# Altium PCB BMS_V0.1.PcbDoc
Units mm, origin at the board's own origin, x right, y up, seen from the top; angles counter-clockwise.
Board outline 57.9 x 36.8 mm, 2 copper layers (Top Layer, Bottom Layer); 42 components, 41 nets, 151 pads, 12 vias.
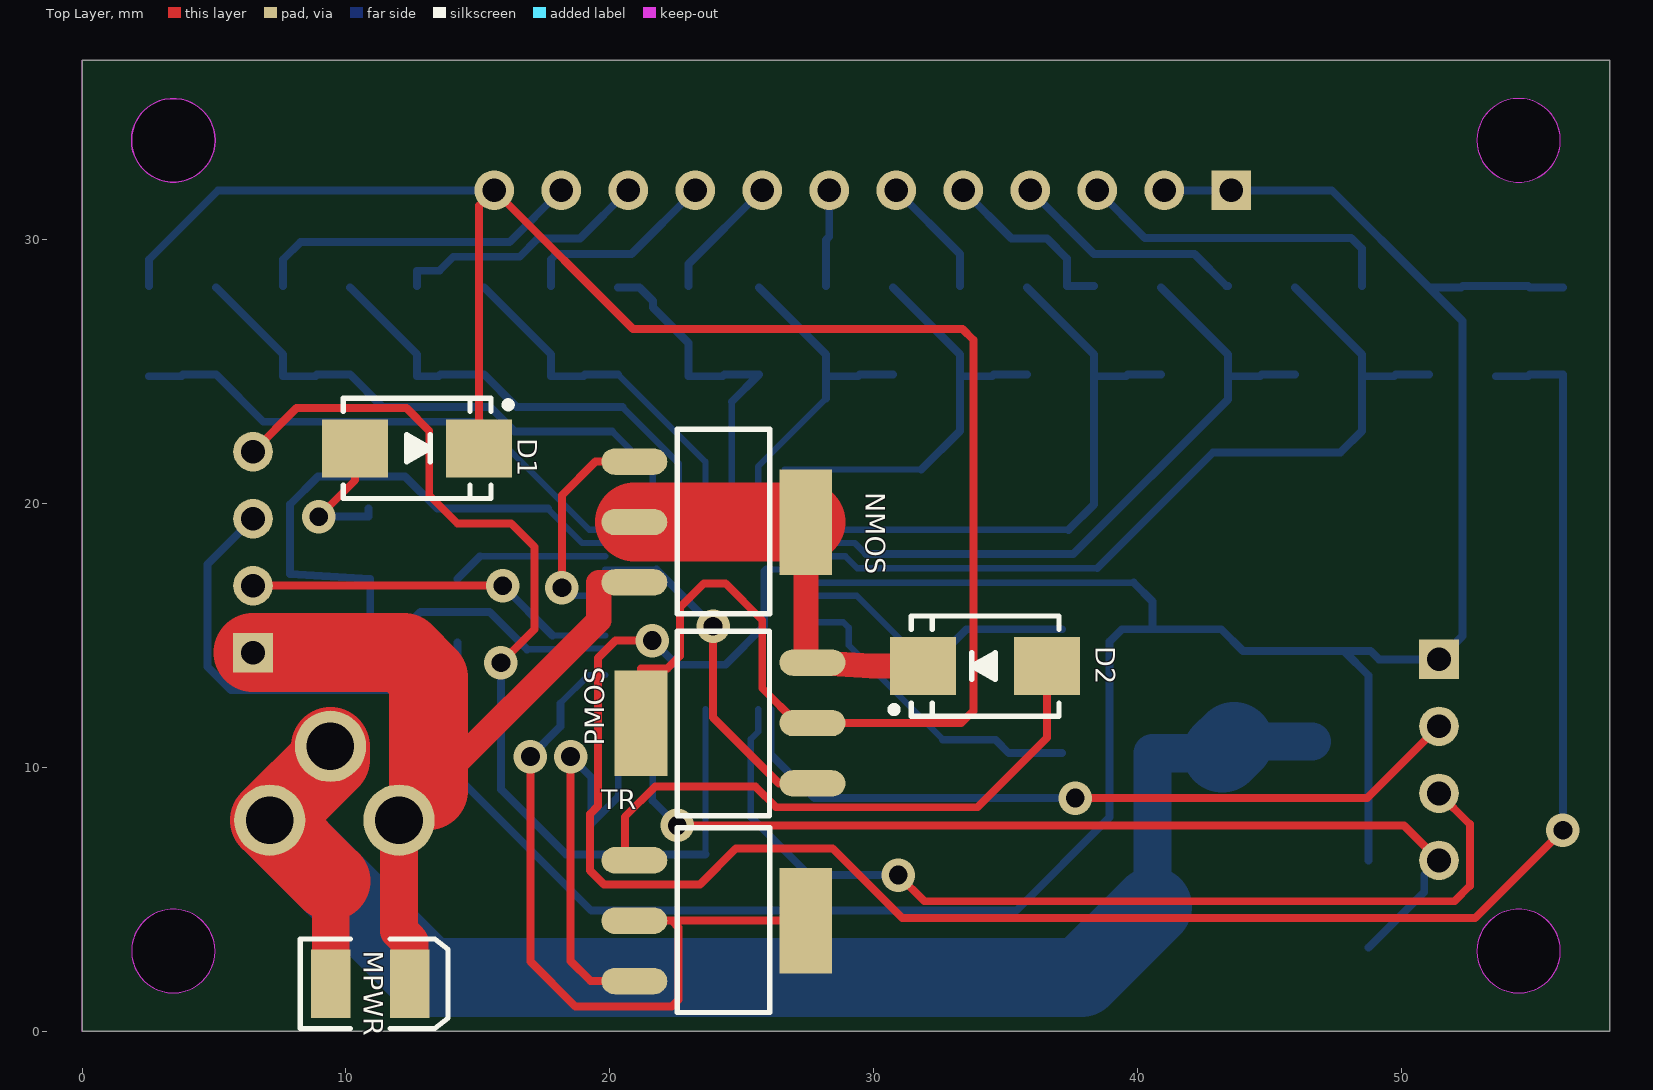
[diagram p0: Top Layer view]
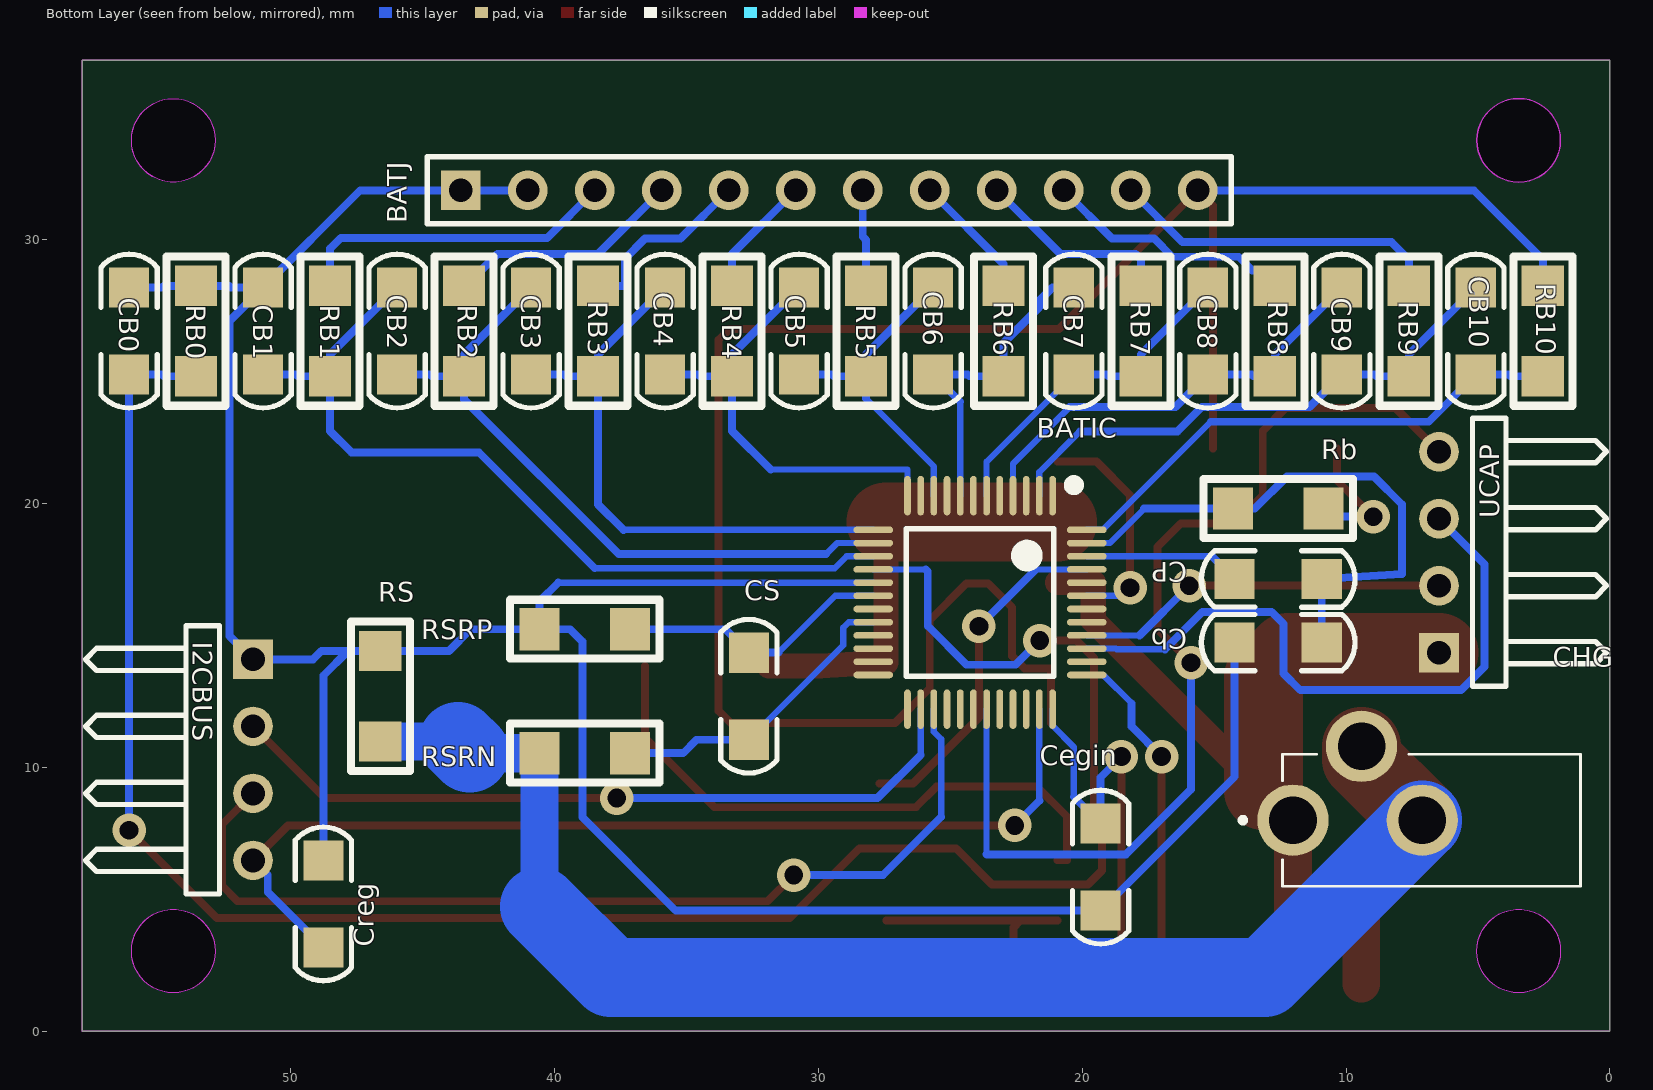
[diagram p1: Bottom Layer view, seen from below]
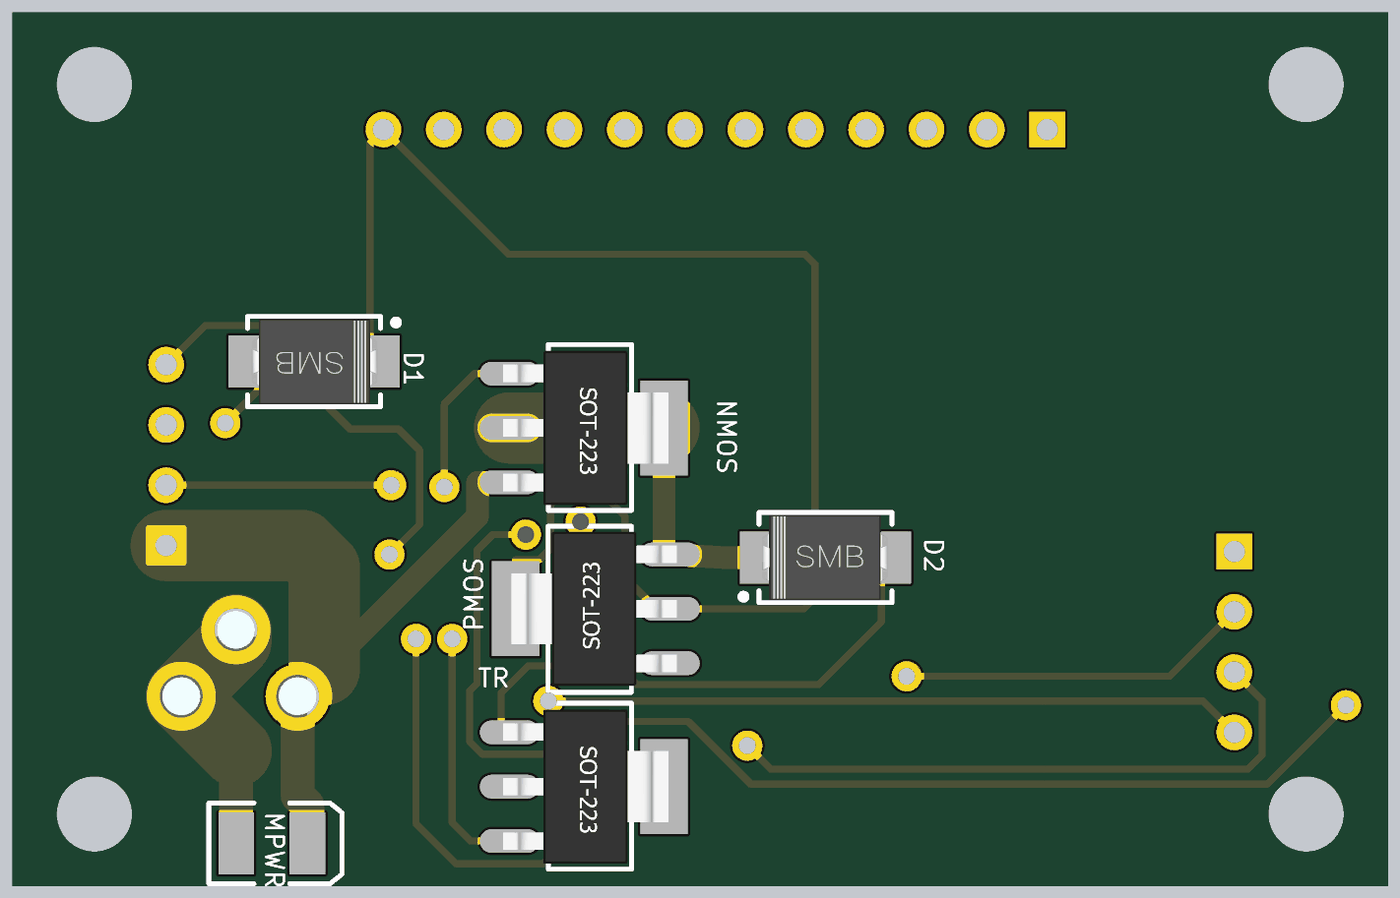
[diagram p2: 3D render of the assembled board from above, using the file's embedded part models]
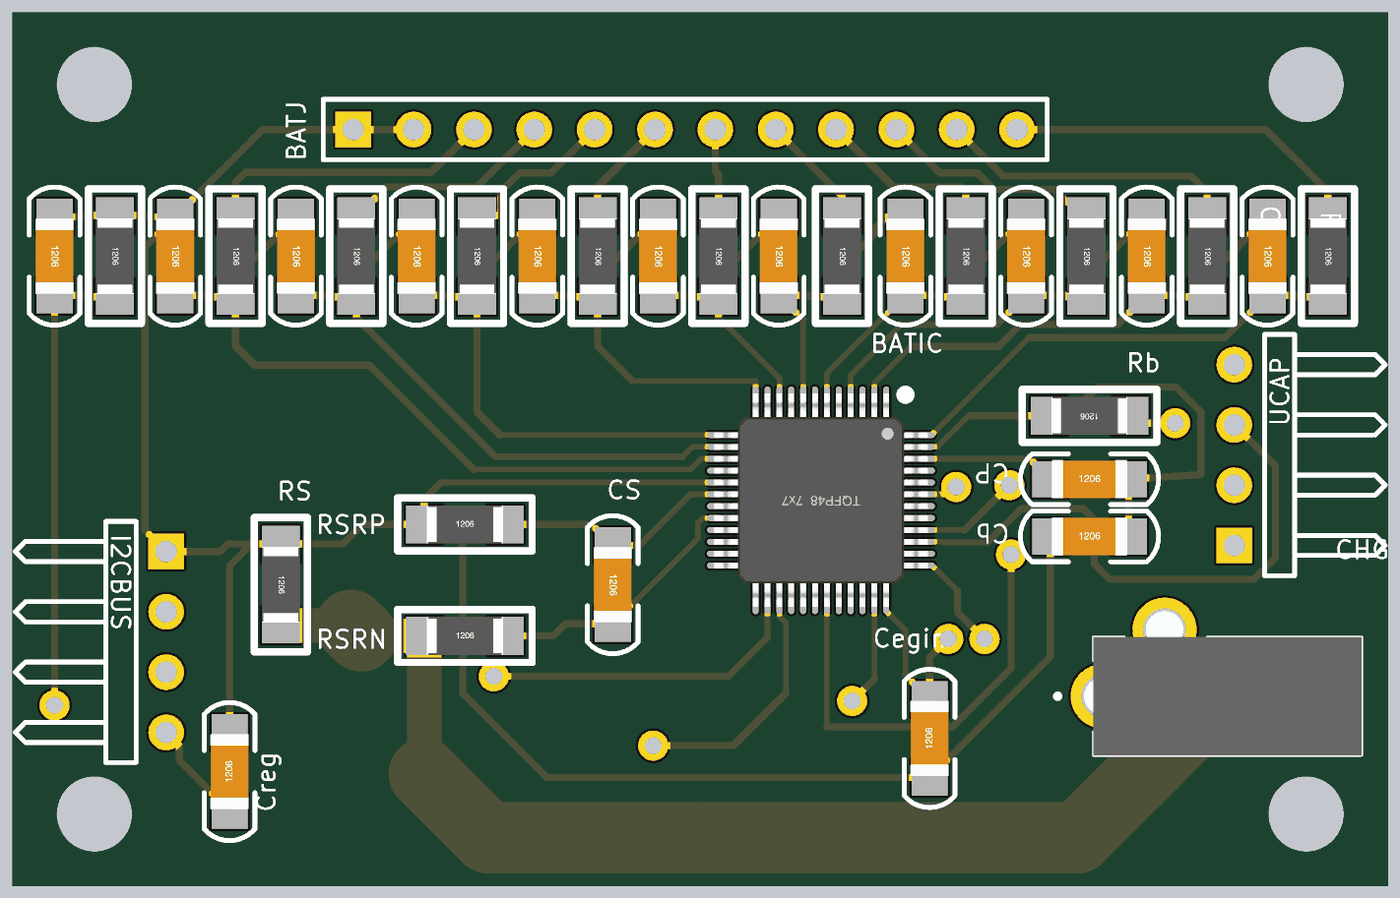
[diagram p3: 3D render of the assembled board from below, using the file's embedded part models]

## Layer stack, top to bottom
Top Solder: solder mask 0.0102, Solder Resist, Dk 3.5
Top Layer: signal copper 0.0356
Dielectric 1: dielectric 0.32, FR-4, Dk 4.8
Bottom Layer: signal copper 0.0356
Bottom Solder: solder mask 0.0102, Solder Resist, Dk 3.5

## Board outline
0.006,0.006 0.006,36.806 57.906,36.806 57.906,0.006
cut-out: 52.871,3.04 ccw(c54.456,3.04) 54.456,1.455 ccw(c54.456,3.04) 56.041,3.04 ccw(c54.456,3.04) 54.456,4.625 ccw(c54.456,3.04)
cut-out: 1.871,3.04 ccw(c3.456,3.04) 3.456,1.455 ccw(c3.456,3.04) 5.041,3.04 ccw(c3.456,3.04) 3.456,4.625 ccw(c3.456,3.04)
cut-out: 52.871,33.773 ccw(c54.456,33.773) 54.456,32.188 ccw(c54.456,33.773) 56.041,33.773 ccw(c54.456,33.773) 54.456,35.358 ccw(c54.456,33.773)
cut-out: 3.456,32.188 cw(c3.456,33.773) 1.871,33.773 cw(c3.456,33.773) 3.456,35.358 cw(c3.456,33.773) 5.041,33.773 cw(c3.456,33.773)

## Design rules (kind name [scope] priority, off if disabled: settings)
Clearance Clearance_1 [InComponent('BATIC')] p1: gap=0.254 ignorepadtopadclearanceinfootprint=TRUE except(0: SMDPad-SMDPad SMDPad-THPad)
Clearance [All] p2: gap=0.254 ignorepadtopadclearanceinfootprint=FALSE
PolygonConnect [All] p1: connectstyle=Relief reliefconductorwidth=0.254 reliefentries=4 polygonreliefangle="90 Angle" airgapwidth=0.254
RoutingVias [All] p1: holewidth=0.711 width=1.27 viastyle="Through Hole" minholewidth=0.711 minwidth=1.27 maxholewidth=0.711 maxwidth=1.27
SMDNeckDown SMDNeckDown_1 [All] p1 off: percent=50.000
SMDNeckDown [All] p2: percent=95.000
SolderMaskExpansion [All] p1: expansion=0.102 istentingtop=FALSE
Width Width_4 [(InNet('BAT+') OR InNet('BAT-') OR InNet('BATM'))] p1: maxlimit=5 minlimit=0.9 preferedwidth=3
Width [All] p2: maxlimit=0.5 minlimit=0.1 preferedwidth=0.3
30 further rules are at their usual default settings.

## Components (designator, comment, footprint, x,y, rotation, side; value= is the part's Value field where it differs from the comment)
BATIC "BQ7694201PFBR" "TQFP48 7x7_L" 23.876,16.256 r0 bottom
BATJ "MHDR1X12" HDR1X12 43.561,31.877 r180 bottom
Cb "Cap" "C 1206" 12.573,14.732 r180 bottom value=100pF
CB0 "Cap" "C 1206" 56.134,26.543 r270 bottom value=100pF
CB1 "Cap" "C 1206" 51.054,26.543 r270 bottom value=100pF
CB2 "Cap" "C 1206" 45.974,26.543 r270 bottom value=100pF
CB3 "Cap" "C 1206" 40.894,26.543 r270 bottom value=100pF
CB4 "Cap" "C 1206" 35.814,26.543 r270 bottom value=100pF
CB5 "Cap" "C 1206" 30.734,26.543 r270 bottom value=100pF
CB6 "Cap" "C 1206" 25.654,26.543 r270 bottom value=100pF
CB7 "Cap" "C 1206" 20.32,26.543 r270 bottom value=100pF
CB8 "Cap" "C 1206" 15.24,26.543 r270 bottom value=100pF
CB9 "Cap" "C 1206" 10.16,26.543 r270 bottom value=100pF
CB10 "Cap" "C 1206" 5.08,26.543 r270 bottom value=100pF
Cegin "Cap" "C 1206" 19.304,6.223 r90 bottom value=100pF
CHG "694102303002" 694102303002 12.012,8.001 r0 bottom
CP "Cap" "C 1206" 12.573,17.145 r180 bottom value=100pF
Creg "Cap" "C 1206" 48.768,4.826 r90 bottom value=100pF
CS "Cap" "C 1206" 32.639,12.7 r270 bottom value=100pF
D1 "Diode 10TQ035" SMB 12.7,22.098 r0 top
D2 "Diode 10TQ035" SMB 34.227,13.843 r180 top
I2CBUS "Header 4" HDR1X4H 51.435,14.097 r270 bottom
MPWR "Header 2" 3.5X2.8X1.9 10.922,1.8 r0 top
NMOS "NMOS-2" SOT-223 27.432,19.304 r270 top
PMOS "PMOS-2" SOT-223 21.186,11.684 r90 top
Rb "Res2" "R 1206" 12.573,19.812 r0 bottom value=1K
RB0 "Res2" "R 1206" 53.594,26.543 r270 bottom value=1K
RB1 "Res2" "R 1206" 48.514,26.543 r270 bottom value=1K
RB2 "Res2" "R 1206" 43.434,26.543 r270 bottom value=1K
RB3 "Res2" "R 1206" 38.354,26.543 r270 bottom value=1K
RB4 "Res2" "R 1206" 33.274,26.543 r270 bottom value=1K
RB5 "Res2" "R 1206" 28.194,26.543 r270 bottom value=1K
RB6 "Res2" "R 1206" 22.987,26.543 r270 bottom value=1K
RB7 "Res2" "R 1206" 17.78,26.543 r270 bottom value=1K
RB8 "Res2" "R 1206" 12.7,26.543 r270 bottom value=1K
RB9 "Res2" "R 1206" 7.62,26.543 r270 bottom value=1K
RB10 "Res2" "R 1206" 2.54,26.543 r270 bottom value=1K
RS "Res2" "R 1206" 46.609,12.7 r270 bottom value=1K
RSRN "Res2" "R 1206" 38.862,10.541 r180 bottom value=1K
RSRP "Res2" "R 1206" 38.862,15.24 r180 bottom value=1K
TR "NPN" SOT-223 27.432,4.191 r270 top
UCAP "Header 5" HDR1X4H 6.477,14.351 r90 bottom

## Footprints (in the part's own frame and the unit in brackets; to place one, negate y for a bottom-side part, rotate by r counter-clockwise, add the part's x,y. Pads: shape width x height; smd on the part's side, far side on the other; paste and mask are expansions set on the pad)
3.5X2.8X1.9 [mm] "SM LED; 2 C-Bend Leads; Body 3.5 x 2.8 x 1.9 mm, inc leads (LxWxH typ)"
  rect 1.5x2.6 smd: 1(-1.5,0) 2(1.5,0)
  silkscreen extent -2.65,-1.7 2.95,1.7
694102303002 [mm]
  round 2.704 hole 1.803: 1(0,0) 2(-4.9,0) 3(-2.6,-2.8)
  silkscreen extent -10.9,-2.5 2,2.5, body extent -10.9,-3.6 0.8,2.5, height 7.7
"C 1206" [mil] "无极性贴片电容"
  rect 60x60 smd: 1(-65,0) 2(65,0)
  silkscreen extent -115,-42 115,42, body extent -63,-32 63,32, height 48
HDR1X4H [mm] "Connector; Header; 4 Position; Right Angle"
  rect 1.5x1.5 hole 0.9: 1(0,0)
  round 1.5 hole 0.9: 2(2.54,0) 3(5.08,0) 4(7.62,0)
  silkscreen extent -1.27,-6.35 8.89,-1.27
HDR1X12 [mm] "Connector; Header; 12 Position"
  rect 1.5x1.5 hole 0.9: 1(0,0)
  round 1.5 hole 0.9: 2(2.54,0) 3(5.08,0) 4(7.62,0) 5(10.16,0) 6(12.7,0) 7(15.24,0) 8(17.78,0) 9(20.32,0) 10(22.86,0) 11(25.4,0) 12(27.94,0)
  silkscreen extent -1.27,-1.27 29.21,1.27
"R 1206" [mil] "1/4W贴片电阻"
  rect 60x62.99 smd: 1(-67.5,0) 2(67.5,0)
  silkscreen extent -112,-44 112,44, body extent -63,-31 63,31, height 22
SMB [mm] "4.7*3.9*2.2mm(长宽高，不包括引脚）"
  rect 2.5x2.2 smd: 1(-2.35,0) 2(2.35,0)
  silkscreen extent -2.8,-1.9 3.58,1.9, body extent -2.63,-1.8 2.67,1.8, height 2.35
SOT-223 [mm]
  oval 1x2.5 smd: 1(-2.29,-6.5) 2(0,-6.5) 3(2.29,-6.5)
  rect 4x2 smd: 2(0,0)
  silkscreen extent -3.52,-4.87 3.48,-1.37, body extent -3.25,-6.78 3.25,0.18, height 1.68
"TQFP48 7x7_L" [mm] "48脚，体宽：7x7mm, 脚距：0.5mm"
  oval 0.25x1.5 smd: 1(-2.75,-4.046) 2(-2.25,-4.046) 3(-1.75,-4.046) 4(-1.25,-4.046) 5(-0.75,-4.046) 6(-0.25,-4.046) 7(0.25,-4.046) 8(0.75,-4.046) 9(1.25,-4.046) 10(1.75,-4.046) 11(2.25,-4.046) 12(2.75,-4.046) 25(2.75,4.046) 26(2.25,4.046) 27(1.75,4.046) 28(1.25,4.046) 29(0.75,4.046) 30(0.25,4.046) 31(-0.25,4.046) 32(-0.75,4.046) 33(-1.25,4.046) 34(-1.75,4.046) 35(-2.25,4.046) 36(-2.75,4.046)
  oval 1.5x0.25 smd: 13(4.046,-2.75) 14(4.046,-2.25) 15(4.046,-1.75) 16(4.046,-1.25) 17(4.046,-0.75) 18(4.046,-0.25) 19(4.046,0.25) 20(4.046,0.75) 21(4.046,1.25) 22(4.046,1.75) 23(4.046,2.25) 24(4.046,2.75) 37(-4.046,2.75) 38(-4.046,2.25) 39(-4.046,1.75) 40(-4.046,1.25) 41(-4.046,0.75) 42(-4.046,0.25) 43(-4.046,-0.25) 44(-4.046,-0.75) 45(-4.046,-1.25) 46(-4.046,-1.75) 47(-4.046,-2.25) 48(-4.046,-2.75)
  silkscreen extent -3.68,-4.57 2.79,2.79, body extent -4.5,-4.5 4.5,4.5, height 1.05

## Part data
BATIC: "Integrated Circuit", Manufacturer_Name="Texas Instruments", Mouser Part Number=595-BQ7694201PFBR, Datasheet Link=https://www.ti.com/lit/gpn/bq76942, Height=1.2mm, Manufacturer_Part_Number=BQ7694201PFBR, Mouser Price/Stock=https://www.mouser.co.uk/ProductDetail/Texas-Instruments/BQ7694201PFBR?qs=iLbezkQI%252BsjbsTRVrFvjUA%3D%3D
BATJ: "Header, 12-Pin", LatestRevisionDate=17-Jul-2002, LatestRevisionNote="Re-released for DXP Platform.", Publisher="Altium Limited"
Cb CB0 CB1 CB2 CB3 CB4 CB5 CB6 CB7 CB8 CB9 CB10 Cegin CP Creg CS: "Capacitor", LatestRevisionDate=17-Jul-2002, LatestRevisionNote="Re-released for DXP Platform.", PackageDescription="Radial Cap, Thru-Hole; 2 Leads; 0.3 in Pin Spacing", PackageReference=RAD-0.3, Published=8-Jun-2000, Publisher="Altium Limited"
CHG: "Connector", Manufacturer_Name="Wurth Elektronik", Mouser Part Number=710-694102303002, Datasheet Link=https://katalog.we-online.de/em/datasheet/6941xx303002.pdf, Height=7.6mm, Manufacturer_Part_Number=694102303002, Mouser Price/Stock=https://www.mouser.co.uk/ProductDetail/Wurth-Elektronik/694102303002?qs=a9WhcLg8qCxbLC%252B3GMhS0A%3D%3D
D1 D2: "Schottky Rectifier", ComponentLink1Description="Manufacturer Link", ComponentLink1URL=http://www.irf.com/, ComponentLink2Description=Datasheet, ComponentLink2URL=http://www.irf.com/product-info/datasheets/data/10tq.pdf, DatasheetVersion=PD-2.057B, LatestRevisionDate=17-Jul-2002, LatestRevisionNote="Re-released for DXP Platform.", Note="Terminal 2 is the TAB and is electrically connected to the cathode", PackageDescription="TO, Thru-Hole, Vertical, Heatsink Mounted; 3 In-Line Leads (1 Absent); Pitch 2.54 mm", PackageReference=TO-220AC, PackageVersion=Feb-1998, Published=8-Jun-2000, Publisher="Altium Limited"
I2CBUS: "Header, 4-Pin", LatestRevisionDate=17-Jul-2002, LatestRevisionNote="Re-released for DXP Platform.", Publisher="Altium Limited"
MPWR: "Header, 2-Pin", LatestRevisionDate=17-Jul-2002, LatestRevisionNote="Re-released for DXP Platform.", Publisher="Altium Limited"
NMOS: "N-Channel Power MOSFET", ComponentLink1Description="Manufacturer Link", ComponentLink1URL=http://www.irf.com/, DatasheetVersion=PD-9.814, LatestRevisionDate=17-Jul-2002, LatestRevisionNote="Re-released for DXP Platform.", Note="Pin 2 is electrically connected to pin 4.", PackageDescription="TO, Thru-Hole, Vertical, Heatsink Mounted; 3 In-Line Leads; Pitch 2.54 mm", PackageReference=TO-220AB, PackageVersion=Feb-1997, Published=8-Jun-2000, Publisher="Altium Limited"
PMOS: "P-Channel Power MOSFET", ComponentLink1Description="Manufacturer Link", ComponentLink1URL=http://www.irf.com/, DatasheetVersion=PD-9.390D, LatestRevisionDate=17-Jul-2002, LatestRevisionNote="Re-released for DXP Platform.", Note="Pin 4 not drawn and electrically connected to Pin 2.", PackageDescription="TO, Thru-Hole, Vertical, Heatsink Mounted; 3 In-Line Leads; Pitch 2.54 mm", PackageReference=TO-220AB, PackageVersion=Feb-1997, Published=8-Jun-2000, Publisher="Altium Limited"
Rb RB0 RB1 RB2 RB3 RB4 RB5 RB6 RB7 RB8 RB9 RB10 RS RSRN RSRP: "Resistor", LatestRevisionDate=17-Jul-2002, LatestRevisionNote="Re-released for DXP Platform.", PackageDescription="Axial Device, Thru-Hole; 2 Leads; 0.4 in Pin Spacing", PackageReference=AXIAL-0.4, Published=8-Jun-2000, Publisher="Altium Limited"
TR: "NPN Bipolar Transistor", Code_JEDEC=TO-226-AA, LatestRevisionDate=17-Jul-2002, LatestRevisionNote="Re-released for DXP Platform.", PackageDescription="TO, Flat Index; 3 In-Line, Axial Leads; Body Dia. 4.8mm; Leads 0.55 x 0.51 mm (max)", PackageReference=TO-226-AA, Published=8-Jun-2000, Publisher="Altium Limited"
UCAP: "Header, 5-Pin", LatestRevisionDate=17-Jul-2002, LatestRevisionNote="Re-released for DXP Platform.", Publisher="Altium Limited"

## Via types
v1: diameter 1.27, hole 0.711, Top Layer to Bottom Layer, 12 vias

## Nets (pads, with @x,y where several pads share a name; then routed paths per layer and width w, separated by ;. In a path a pad name is that pad's centre, name@x,y a point inside that pad or via, vN(x,y) a via of type N, cw(c..) or ccw(c..) an arc to the next point about the centre after c; other vN are vias at no path point)
BAT: BATIC.47 Cb.2 CP.2 Rb.2 | length 21.5
  Bottom Layer w0.238: 17.653,19.812 18.959,18.506 BATIC.47
  Bottom Layer w0.3: Cb.2 CP.2 7.886,17.336 7.886,19.976 8.941,21.031 12.243,21.031 13.462,19.812 Rb.2 17.653,19.812
BAT10: BATJ.12 D1.2 PMOS.2 RB10.1 | length 80.7
  Top Layer w0.3: D1.2 15.05,31.306 BATJ.12 20.879,26.619 33.376,26.619 33.782,26.213 33.782,12.141 33.325,11.684 27.686,11.684 27.103,11.684 25.782,13.005 25.782,15.581 24.384,16.979 23.571,16.979 22.657,16.065 22.657,14.224 22.183,13.75 21.186,13.75 PMOS.2@21.186,11.684
  Bottom Layer w0.3: RB10.1 2.54,29.261 5.156,31.877 BATJ.12
BAT+: CHG.1 MPWR.2 NMOS.3 UCAP.1 | length 31.2
  Top Layer w0.95: CHG.1 13.132,9.121 19.583,15.572 19.583,17.014 NMOS.3
  Top Layer w1.425: CHG.1 12.012,3.81 12.422,3.4 MPWR.2
  Top Layer w3: UCAP.1 12.192,14.351 13.132,13.411 13.132,9.121
BAT-: CHG.2 CHG.3 MPWR.1 RS.2 RSRN.1 | length 60
  Top Layer w1.425: MPWR.1 9.422,5.691
  Top Layer w3: CHG.3 9.412,10.301 CHG.2 9.422,5.691
  Bottom Layer w1.448: 40.576,4.736 RSRN.1 43.218,10.541 ; 43.663,10.986 RS.2
  Bottom Layer w3: CHG.2 13.081,2.032 37.873,2.032 40.576,4.736 ; 43.218,10.541 43.663,10.986
BATM: D2.2 NMOS.2 PMOS.3 | length 16.3
  Top Layer w0.95: NMOS.2@27.432,19.304 27.432,13.974 PMOS.3 29.925,13.843 D2.2
  Top Layer w3: NMOS.2@20.932,19.304 NMOS.2@27.432,19.304
CP1: BATIC.46 CP.1 | length 6
  Bottom Layer w0.238: 15.085,18.006 BATIC.46
  Bottom Layer w0.3: CP.1 15.085,18.006
GND: BATIC.17 BATJ.1 BATJ.2 CB0.1 CB1.1 Cb.1 Cegin.1 Creg.2 I2CBUS.1 RB0.1 RS.1 RSRP.1 | length 107.2
  Bottom Layer w0.238: BATIC.17 39.865,17.006
  Bottom Layer w0.3: Cb.1 14.224,9.652 Cegin.1 35.408,4.572 38.949,8.113 38.949,14.768 39.421,15.24 RSRP.1 ; 39.865,17.006 40.576,16.294 RSRP.1 ; BATJ.2 BATJ.1 47.371,31.877 CB1.1 ; Creg.2 48.768,13.48 47.834,14.414 ; CB0.1 54.877,28.194 54.813,28.258 RB0.1 52.337,28.258 52.273,28.194 CB1.1 ; RSRP.1 43.18,15.24 44.005,14.414 RS.1 47.834,14.414 ; 47.834,14.414 48.844,14.414 49.162,14.097 I2CBUS.1 52.324,14.986 52.324,26.924 CB1.1
NetBATIC_2: BATIC.2 CB9.2 CB10.1 RB9.2 | length 20.9
  Bottom Layer w0.238: 20.09,22.734 21.626,21.198 BATIC.2
  Bottom Layer w0.3: CB10.1 7.62,25.654 RB9.2 8.839,24.829 8.903,24.892 CB9.2 11.389,23.663 15.468,23.663 16.396,22.734 20.09,22.734
NetBATIC_4: BATIC.4 CB8.2 CB9.1 RB8.2 | length 17
  Bottom Layer w0.238: 20.483,23.663 22.626,21.519 BATIC.4
  Bottom Layer w0.3: CB9.1 12.7,25.654 RB8.2 13.52,24.829 13.583,24.892 CB8.2 16.469,23.663 20.483,23.663
NetBATIC_6: BATIC.6 CB7.2 CB8.1 RB7.2 | length 12.9
  Bottom Layer w0.238: CB7.2 23.626,21.586 BATIC.6
  Bottom Layer w0.3: CB8.1 17.78,25.654 RB7.2 18.999,24.829 19.063,24.892 CB7.2
NetBATIC_8: BATIC.8 CB6.2 CB7.1 RB6.2 | length 12.7
  Bottom Layer w0.238: BATIC.8 24.626,23.864
  Bottom Layer w0.3: CB7.1 21.133,28.194 21.641,27.686 21.641,27.432 22.987,26.086 RB6.2 24.282,24.829 24.346,24.892 CB6.2 24.626,23.864
NetBATIC_10: BATIC.10 CB5.2 CB6.1 RB5.2 | length 12.6
  Bottom Layer w0.238: BATIC.10 25.626,21.412 28.194,23.98
  Bottom Layer w0.3: CB6.1 28.194,25.654 RB5.2 ; 28.194,23.98 RB5.2 ; CB5.2 29.477,24.892 29.413,24.829 RB5.2
NetBATIC_12: BATIC.12 CB4.2 CB5.1 RB4.2 | length 17.3
  Bottom Layer w0.238: BATIC.12 26.626,21.292 31.808,21.292
  Bottom Layer w0.3: CB5.1 33.274,25.654 RB4.2 ; 31.808,21.292 33.274,22.758 RB4.2 ; CB4.2 34.557,24.892 34.493,24.829 RB4.2
NetBATIC_13: BATIC.13 CB3.2 CB4.1 RB3.2 | length 22.7
  Bottom Layer w0.238: BATIC.13 37.389,19.006
  Bottom Layer w0.3: CB4.1 38.354,25.654 RB3.2 ; 37.389,19.006 38.354,19.971 RB3.2 ; CB3.2 39.637,24.892 39.573,24.829 RB3.2
NetBATIC_14: BATIC.14 CB2.2 CB3.1 RB2.2 | length 26
  Bottom Layer w0.238: BATIC.14 29.298,18.506 29.715,18.09
  Bottom Layer w0.3: 29.715,18.09 37.572,18.09 43.434,23.952 RB2.2 ; CB3.1 43.434,25.654 RB2.2 ; CB2.2 44.717,24.892 44.653,24.829 RB2.2
NetBATIC_15: BATIC.15 CB1.2 CB2.1 RB1.2 | length 32
  Bottom Layer w0.238: BATIC.15 28.933,18.006 29.388,17.551 38.481,17.551
  Bottom Layer w0.3: 38.481,17.551 42.875,21.946 47.701,21.946 48.514,22.758 RB1.2 ; CB2.1 48.514,25.654 RB1.2 ; CB1.2 49.797,24.892 49.733,24.829 RB1.2
NetBATIC_16: BATIC.16 CB0.2 RB0.2 | length 79.9
  Top Layer w0.3: v1(21.615,14.808) 20.218,14.808 19.558,14.148 19.558,8.534 19.253,8.23 19.253,6.096 19.787,5.563 23.419,5.563 24.79,6.934 28.448,6.934 31.09,4.293 52.807,4.293 v1(56.134,7.62)
  Bottom Layer w0.238: 25.933,17.506 BATIC.16
  Bottom Layer w0.3: v1(21.615,14.808) 22.53,13.894 24.384,13.894 25.857,15.367 25.857,17.43 25.933,17.506 ; RB0.2 54.813,24.829 54.877,24.892 CB0.2 v1(56.134,7.62)
NetBATIC_18: BATIC.18 CS.1 RSRP.2 | length 10.5
  Bottom Layer w0.238: BATIC.18 29.367,16.506 31.522,14.351
  Bottom Layer w0.3: 31.522,14.351 CS.1 33.528,15.24 RSRP.2
NetBATIC_20: BATIC.20 CS.2 RSRN.2 | length 11.7
  Bottom Layer w0.238: BATIC.20 28.854,15.506 29.058,15.303 29.058,14.63 CS.2
  Bottom Layer w0.3: CS.2 34.62,11.049 35.128,10.541 RSRN.2
NetBATIC_31: BATIC.31 UCAP.4 | length 39
  Top Layer w0.3: UCAP.4 8.128,23.622 12.294,23.622 13.157,22.758 13.157,20.32 14.224,19.253 16.256,19.253 17.145,18.364 17.145,15.24 v1(15.875,13.97)
  Bottom Layer w0.238: 23.626,6.71 BATIC.31
  Bottom Layer w0.3: v1(15.875,13.97) 15.875,9.169 18.339,6.706 23.622,6.706 23.626,6.71
NetBATIC_36: BATIC.36 Cegin.2 TR.3 | length 18.4
  Top Layer w0.3: v1(18.517,10.414) 18.517,2.663 19.279,1.901 TR.3
  Bottom Layer w0.238: 20.32,8.89 20.32,10.776 21.126,11.582 BATIC.36
  Bottom Layer w0.3: v1(18.517,10.414) 19.304,9.626 Cegin.2 20.32,8.89
NetBATIC_37: BATIC.37 TR.2 | length 28.4
  Top Layer w0.3: v1(16.993,10.414) 16.993,2.642 18.694,0.94 22.352,0.94 22.606,1.194 22.606,3.937 22.352,4.191 ; TR.2@20.932,4.191 22.352,4.191 ; TR.2@27.432,4.191 22.352,4.191
  Bottom Layer w0.238: 18.128,12.431 19.202,13.506 BATIC.37
  Bottom Layer w0.3: v1(16.993,10.414) 18.128,11.549 18.128,12.431
NetBATIC_43: BATIC.43 NMOS.1 | length 8.5
  Top Layer w0.3: v1(18.186,16.815) 18.186,20.32 19.46,21.594 NMOS.1
  Bottom Layer w0.238: v1(18.186,16.815) 18.495,16.506 BATIC.43
NetBATIC_45: BATIC.45 PMOS.1 | length 13.2
  Top Layer w0.3: v1(23.918,15.356) 23.918,11.892 26.416,9.394 PMOS.1
  Bottom Layer w0.238: BATIC.45 21.768,17.506
  Bottom Layer w0.3: 21.768,17.506 v1(23.918,15.356)
NetBATIC_48: BATIC.48 CB10.2 RB10.2 | length 19.8
  Bottom Layer w0.238: 15.122,23.105 19.221,19.006 BATIC.48
  Bottom Layer w0.3: RB10.2 3.759,24.829 3.823,24.892 CB10.2 6.867,23.105 15.122,23.105
NetBATJ_3: BATJ.3 RB1.1 | length 12.4
  Bottom Layer w0.3: BATJ.3 40.284,30.074 48.108,30.074 48.514,29.667 RB1.1
NetBATJ_4: BATJ.4 RB2.1 | length 9
  Bottom Layer w0.3: BATJ.4 38.354,29.464 42.164,29.464 43.37,28.258 RB2.1
NetBATJ_5: BATJ.5 RB3.1 | length 7.1
  Bottom Layer w0.3: BATJ.5 35.23,30.048 36.576,30.048 37.338,29.286 37.338,28.258 RB3.1
NetBATJ_6: BATJ.6 RB4.1 | length 4.6
  Bottom Layer w0.3: BATJ.6 33.274,29.464 RB4.1
NetBATJ_7: BATJ.7 RB5.1 | length 3.7
  Bottom Layer w0.3: RB5.1 28.194,29.997 28.321,30.124 BATJ.7
NetBATJ_8: BATJ.8 RB6.1 | length 4.8
  Bottom Layer w0.3: RB6.1 22.987,29.083 BATJ.8
NetBATJ_9: BATJ.9 RB7.1 | length 7.5
  Bottom Layer w0.3: RB7.1 17.78,29.261 17.983,29.464 20.828,29.464 BATJ.9
NetBATJ_10: BATJ.10 RB8.1 | length 9.8
  Bottom Layer w0.3: RB8.1 12.7,28.829 13.541,28.829 14.072,29.36 16.586,29.36 17.274,30.048 18.872,30.048 BATJ.10
NetBATJ_11: BATJ.11 RB9.1 | length 12.6
  Bottom Layer w0.3: RB9.1 7.62,29.261 8.273,29.914 16.198,29.914 BATJ.11
NetD1_1: D1.1 Rb.1 | length 5.4
  Top Layer w0.3: v1(8.966,19.507) 10.35,20.891 D1.1
  Bottom Layer w0.3: v1(8.966,19.507) 10.858,19.507 Rb.1
NetD2_1: D2.1 TR.1 | length 22.6
  Top Layer w0.3: TR.1 20.574,6.481 20.574,8.128 21.726,9.28 25.518,9.28 26.308,8.49 33.942,8.49 36.577,11.125 D2.1
PCHG: BATIC.40 UCAP.2 | length 14.1
  Top Layer w0.3: UCAP.2 v1(15.946,16.891)
  Bottom Layer w0.238: 17.831,15.006 BATIC.40
  Bottom Layer w0.3: v1(15.946,16.891) 17.831,15.006
PDSG: BATIC.39 UCAP.3 | length 24.7
  Bottom Layer w0.238: 16.866,14.478 18.694,14.478 18.722,14.506 BATIC.39
  Bottom Layer w0.3: UCAP.3 4.75,17.704 4.75,13.818 5.639,12.929 11.735,12.929 12.37,13.564 12.37,15.443 12.827,15.9 15.443,15.9 16.866,14.478
SCL: BATIC.26 I2CBUS.2 | length 28.8
  Top Layer w0.3: v1(37.643,8.839) 48.717,8.839 I2CBUS.2
  Bottom Layer w0.238: 26.126,10.475 BATIC.26
  Bottom Layer w0.3: 26.126,10.475 27.762,8.839 v1(37.643,8.839)
SDA: BATIC.27 I2CBUS.3 | length 37
  Top Layer w0.3: v1(30.937,5.918) 31.928,4.928 52.019,4.928 52.603,5.512 52.603,7.849 I2CBUS.3
  Bottom Layer w0.238: 25.349,8.128 25.349,11.074 25.626,11.351 BATIC.27
  Bottom Layer w0.3: 25.349,8.128 27.559,5.918 v1(30.937,5.918)
VCC: BATIC.35 Creg.1 I2CBUS.4 | length 38.6
  Top Layer w0.3: v1(22.563,7.8) 50.112,7.8 I2CBUS.4
  Bottom Layer w0.238: 21.626,8.738 BATIC.35
  Bottom Layer w0.3: 21.626,8.738 v1(22.563,7.8) ; Creg.1 50.876,5.283 50.876,5.918 I2CBUS.4
pads on no net: BATIC.1 BATIC.3 BATIC.5 BATIC.7 BATIC.9 BATIC.11 BATIC.19 BATIC.21 BATIC.22 BATIC.23 BATIC.24 BATIC.25 BATIC.28 BATIC.29 BATIC.30 BATIC.32 BATIC.33 BATIC.34 BATIC.38 BATIC.41 BATIC.42 BATIC.44

## Keep-outs
Keep-Out Layer:
  circle w0.013: c54.456,33.773 r1.585
  circle w0.013: c3.456,3.04 r1.585
  circle w0.013: c54.456,3.04 r1.585
  circle w0.013: c3.456,33.773 r1.585
  lines w0.013: 0.006,0.006 0.006,36.806 57.906,36.806 57.906,0.006 0.006,0.006